# Altium PCB mag_pos_nutz.PcbDoc
Units mm, origin at the board's own origin, x right, y up, seen from the top; angles counter-clockwise.
Board outline 100 x 100 mm, 4 copper layers (Top Layer, Layer 1, Layer 2, Bottom Layer), stack 0.961 mm thick; 11 components, 0 nets, 16 pads, 0 vias.
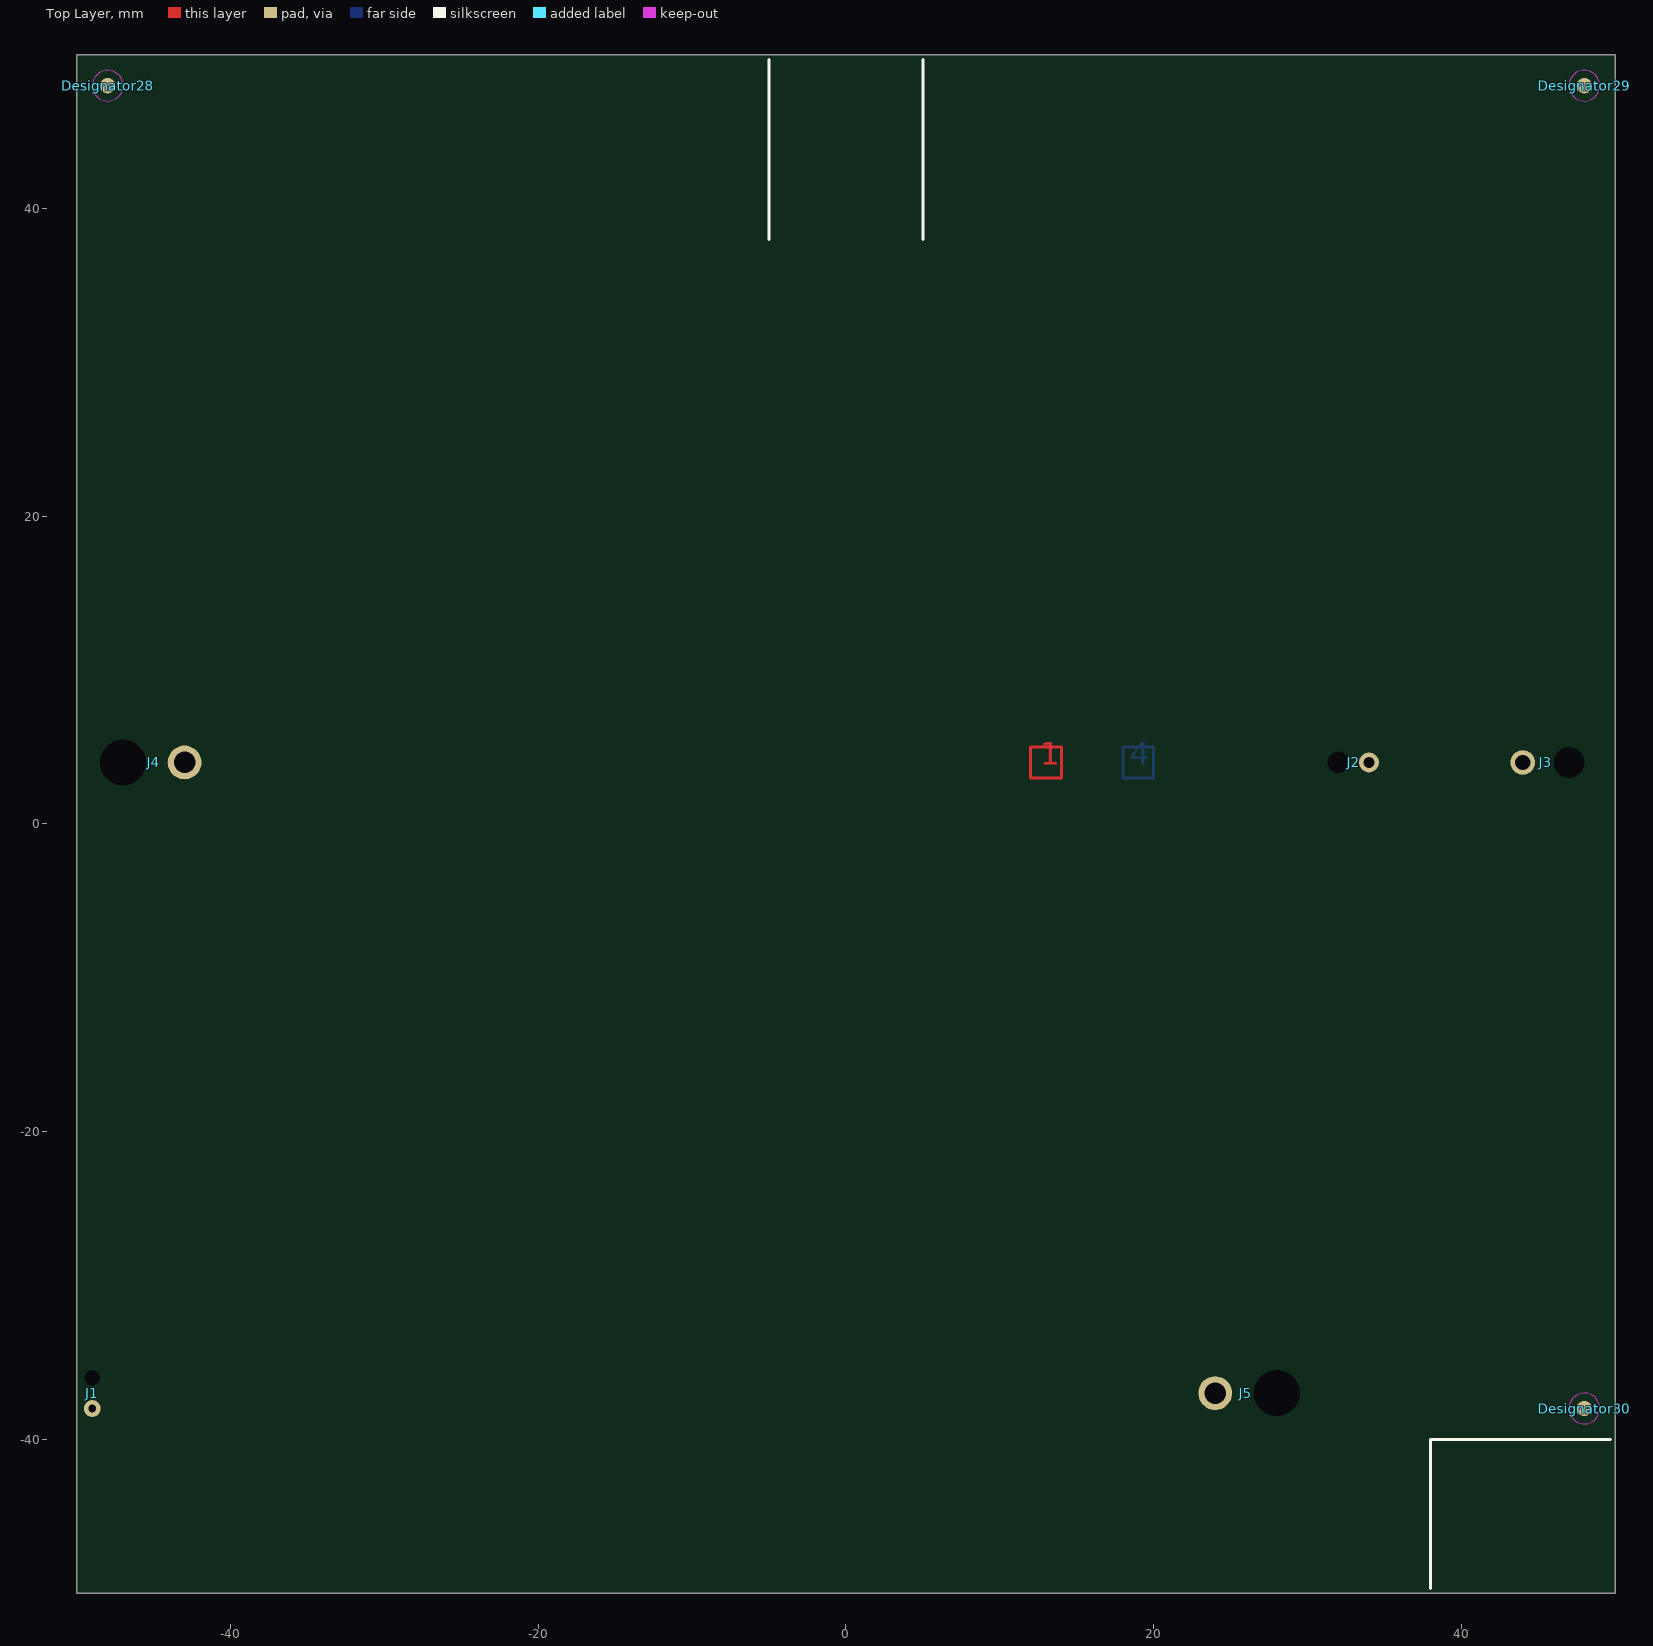
[diagram p0: Top Layer view]
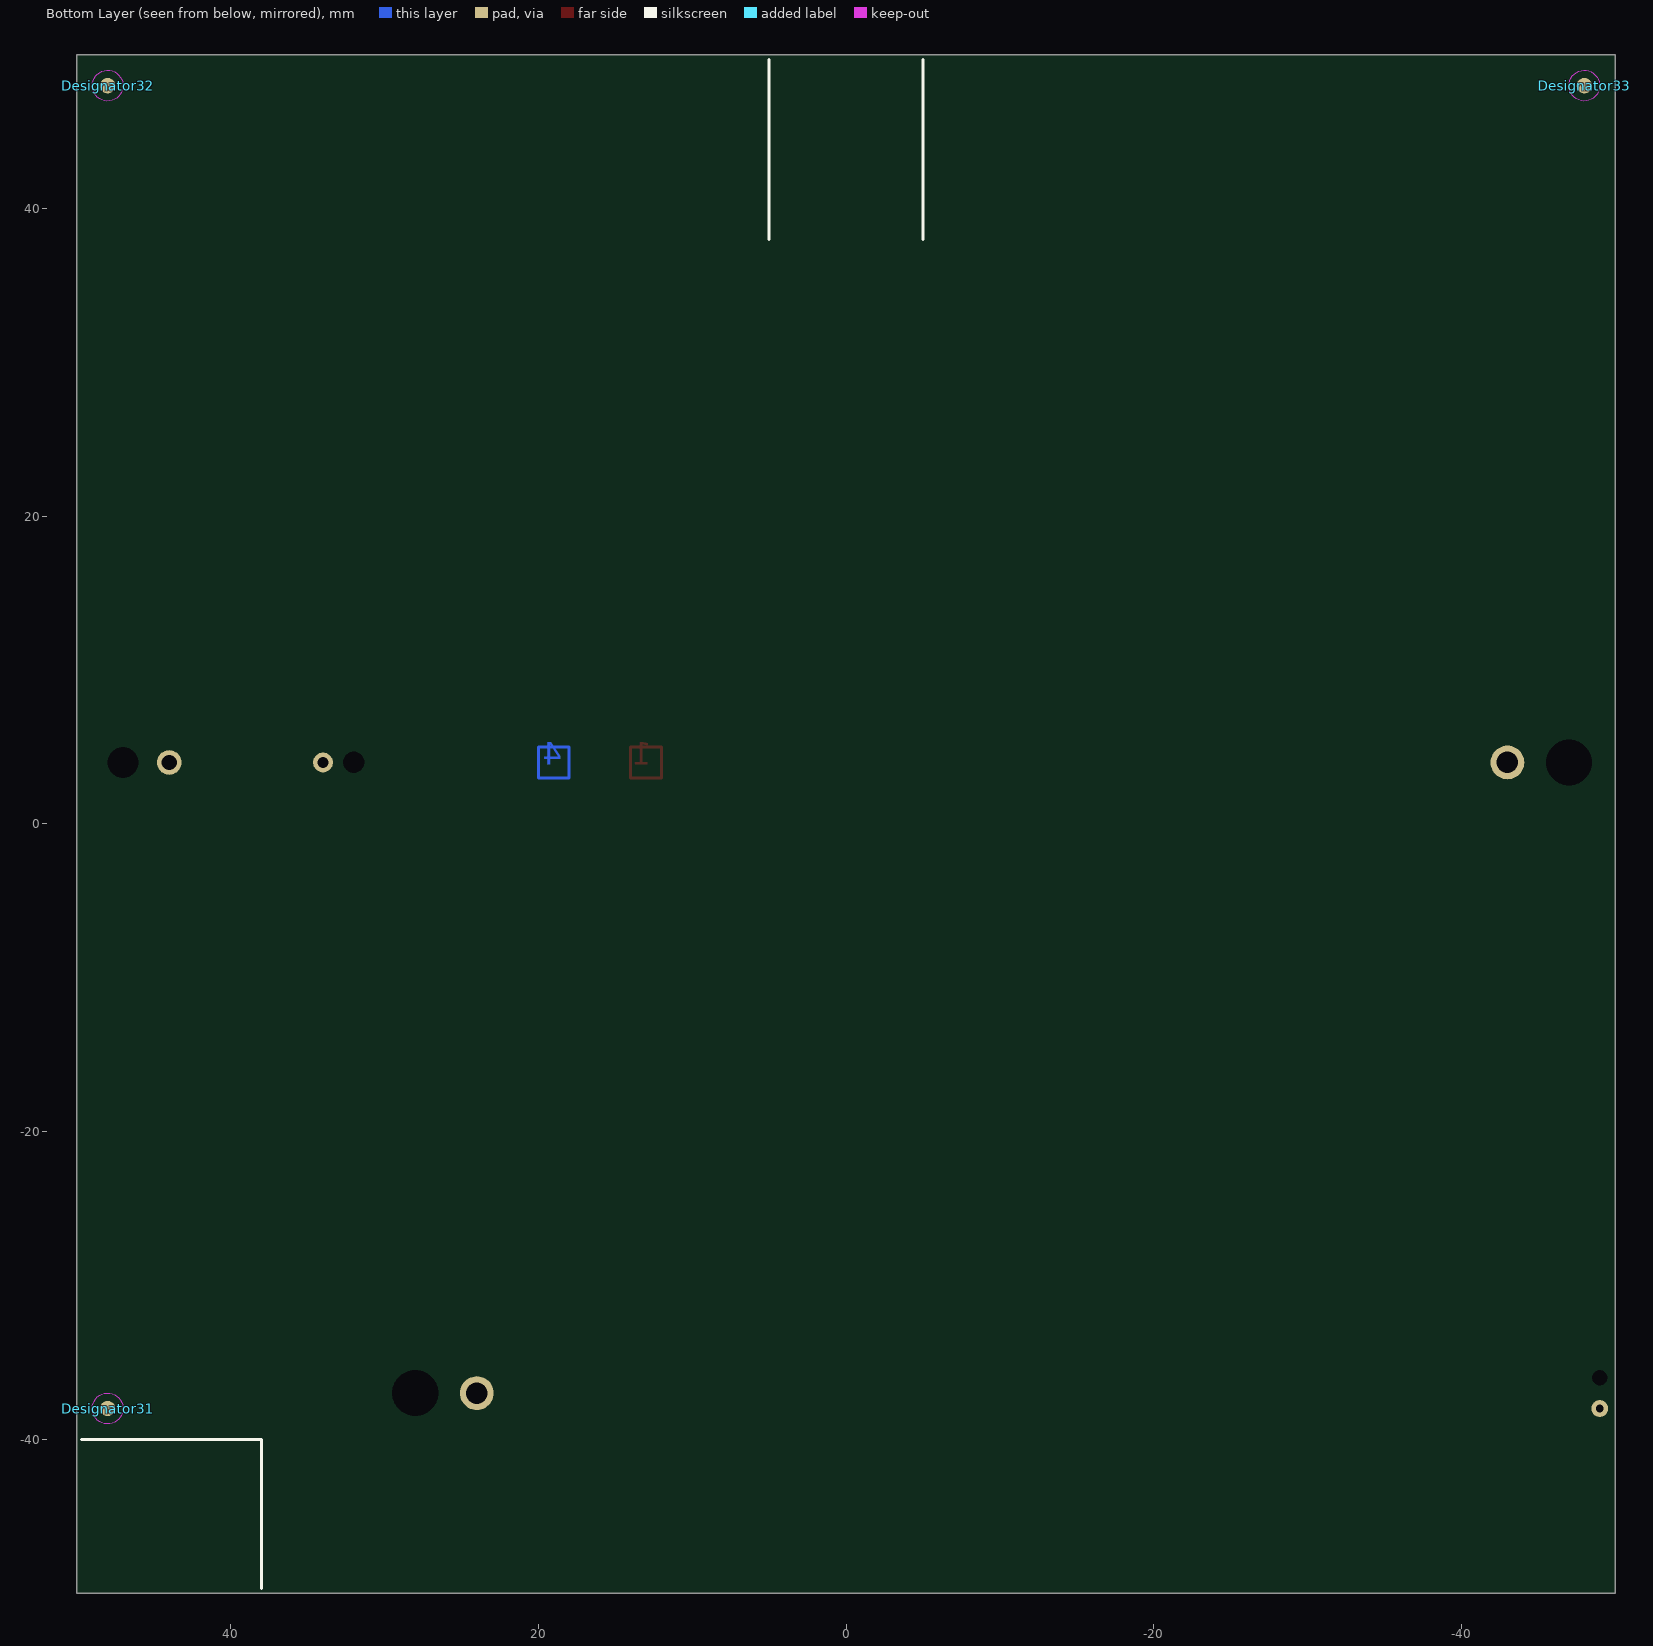
[diagram p1: Bottom Layer view, seen from below]
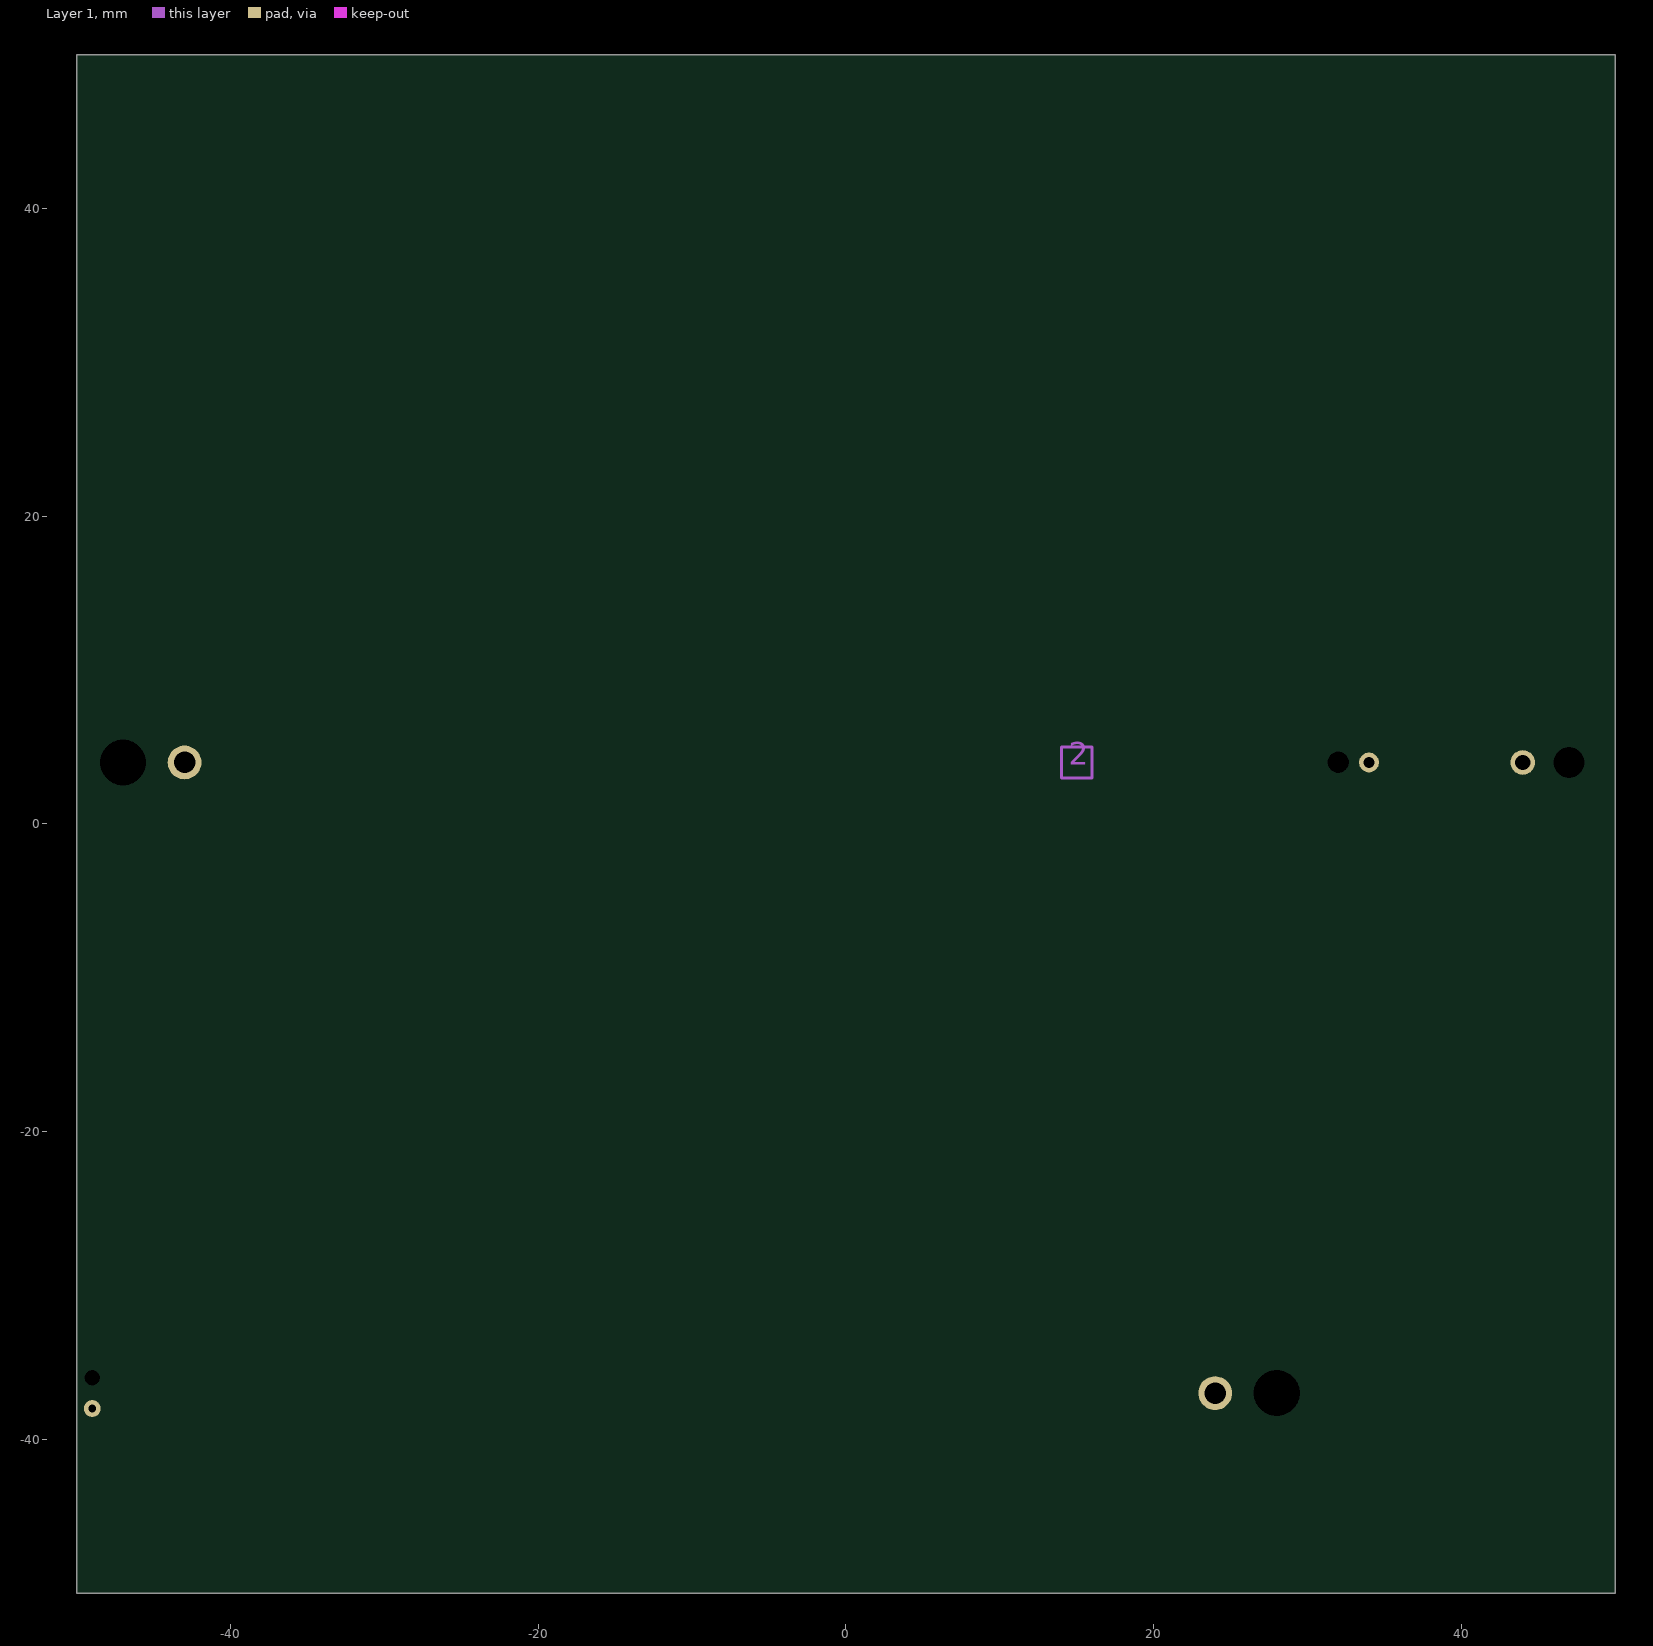
[diagram p2: Layer 1]
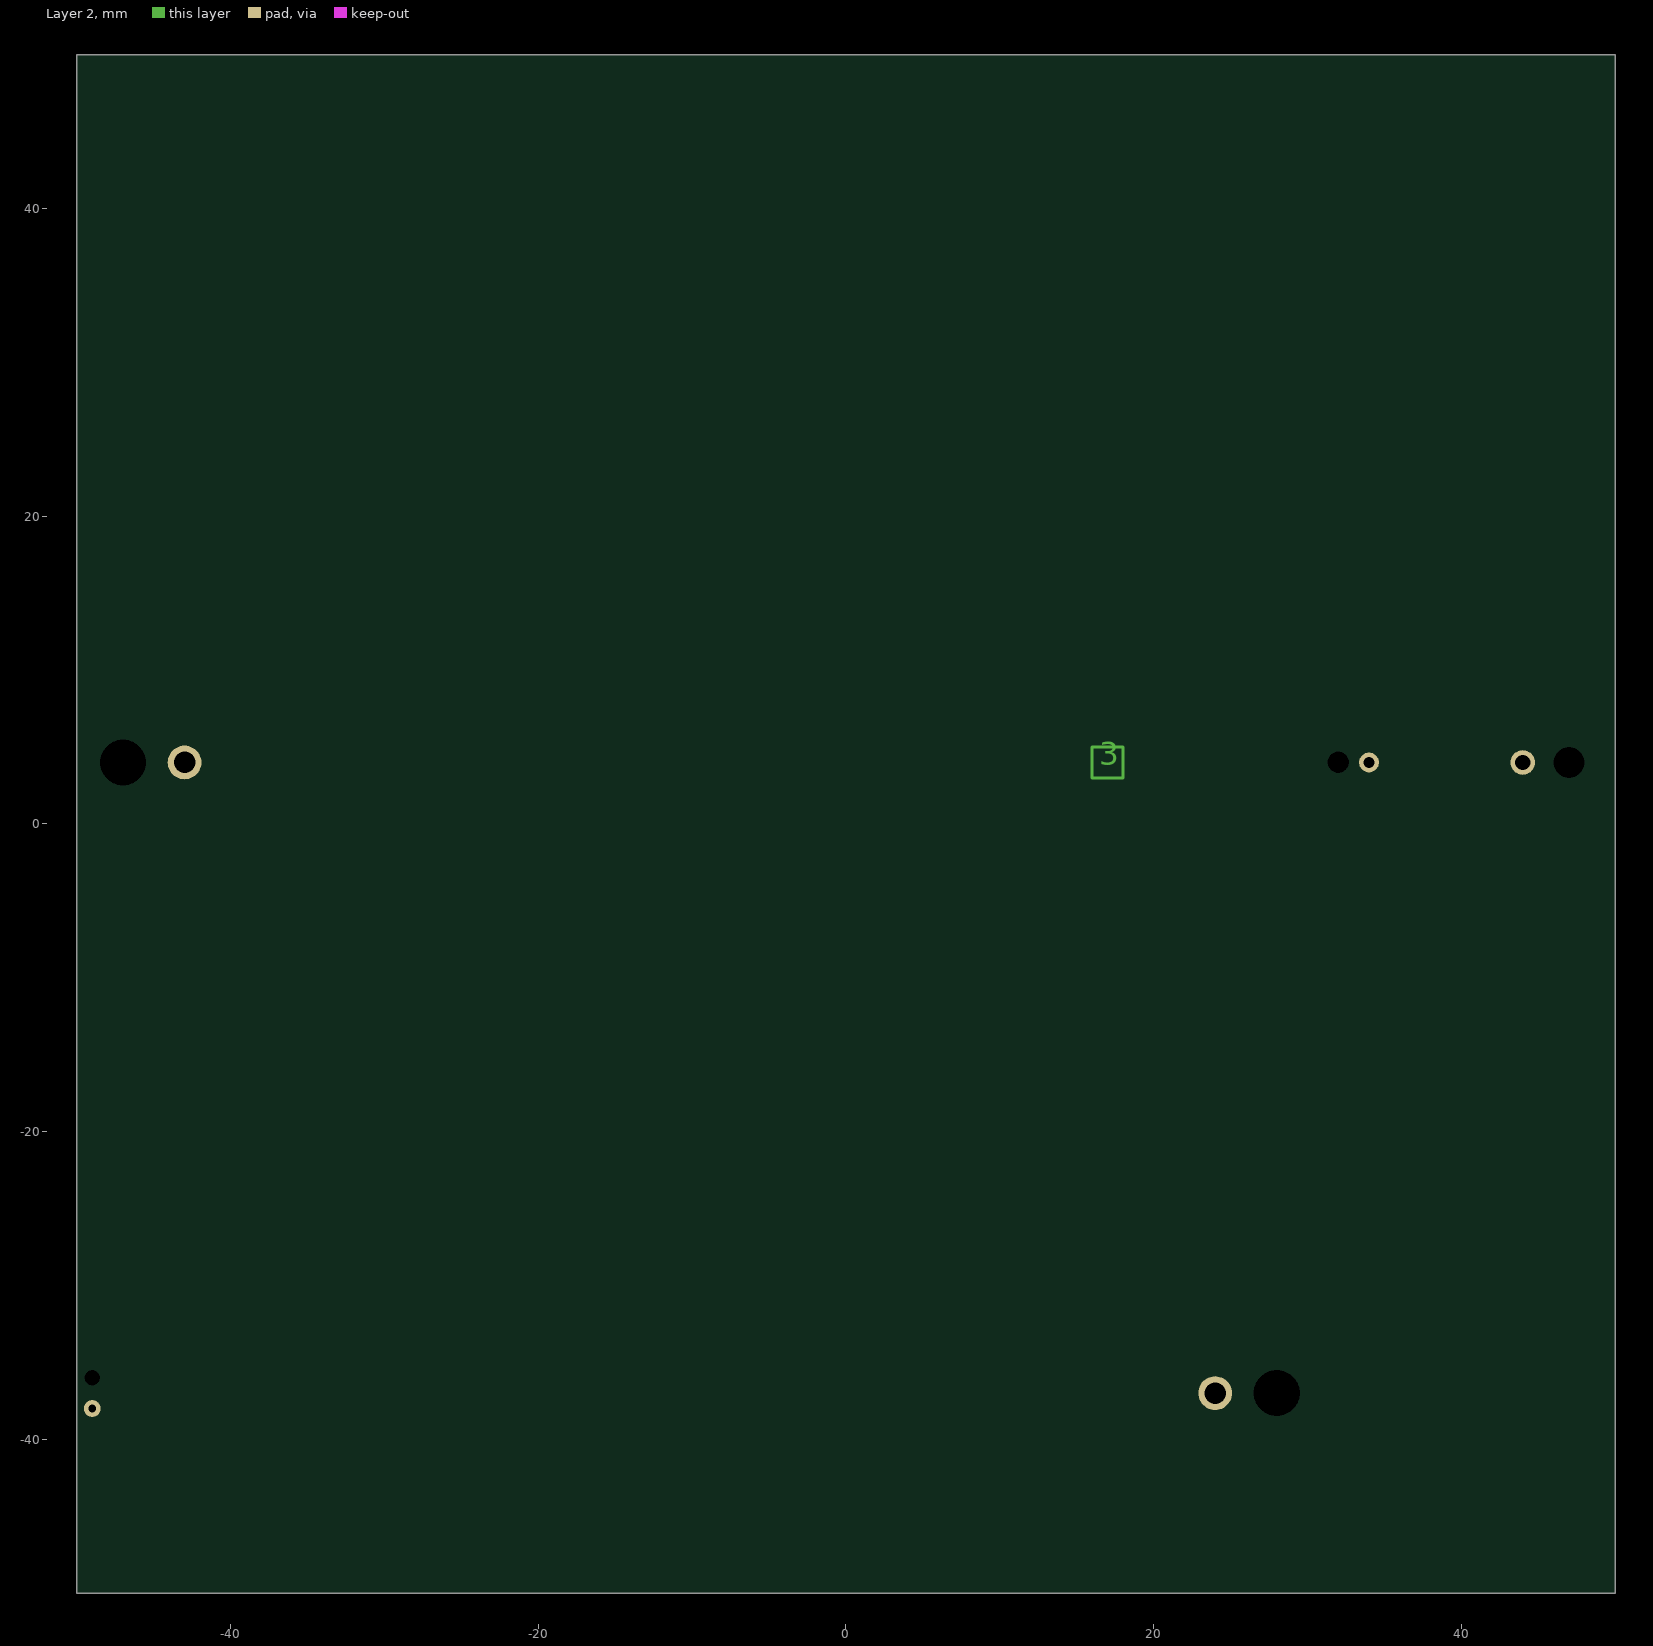
[diagram p3: Layer 2]

## Layer stack, top to bottom
Top Solder: solder mask 0.0102, Solder Resist, Dk 3.5
Top Layer: signal copper 0.0356
Dielectric 2: prepreg 0.11, PP-006, Dk 4.1
Layer 1: signal copper 0.035
Dielectric 1: dielectric 0.6, FR-4, Dk 4.8
Layer 2: signal copper 0.035
Dielectric 3: prepreg 0.11, PP-006, Dk 4.1
Bottom Layer: signal copper 0.0356
Bottom Solder: solder mask 0.0102, Solder Resist, Dk 3.5

## Board outline
-50,-50 -50,50 50,50 50,-50

## Design rules (kind name [scope] priority, off if disabled: settings)
Clearance [All] p1: gap=0.2 ignorepadtopadclearanceinfootprint=FALSE except(0: Arc-Hole Track-Hole SMDPad-Hole THPad-Hole Via-Hole Fill-Hole Poly-Hole Region-Hole Text-Hole)
PolygonConnect [All] p1: connectstyle=Relief reliefconductorwidth=0.254 reliefentries=4 polygonreliefangle="90 Angle" airgapwidth=0.254
RoutingVias [All] p1: holewidth=0.711 width=1.27 viastyle="Through Hole" minholewidth=0.711 minwidth=1.27 maxholewidth=0.711 maxwidth=1.27
SolderMaskExpansion [All] p1: expansion=0.102 istentingtop=FALSE
Width [All] p1: maxlimit=0.5 minlimit=0.2 preferedwidth=0.2 minimp=50.000000 maximp=50.000000 favimp=50.000000
30 further rules are at their usual default settings.

## Components (designator, comment, footprint, x,y, rotation, side; value= is the part's Value field where it differs from the comment)
Designator28 "Comment" Fiducial_Marker -48,48 r0 top
Designator29 "Comment" Fiducial_Marker 48,48 r0 top
Designator30 "Comment" Fiducial_Marker 48,-38 r0 top
Designator31 "Comment" Fiducial_Marker 48,-38 r180 bottom
Designator32 "Comment" Fiducial_Marker 48,48 r180 bottom
Designator33 "Comment" Fiducial_Marker -48,48 r180 bottom
J1 "0.034mm^2" CON_1X1_WIRE_0.034MM2_RELIEF -49,-38 r90 top (schematic designator J6)
J2 "0.1mm^2" CON_1X1_WIRE_0.1MM2_RELIEF 34,4 r180 top (schematic designator J6)
J3 "0.25mm^2" CON_1X1_WIRE_0.25MM2_RELIEF 44,4 r0 top (schematic designator J6)
J4 "0.5mm^2" CON_1X1_WIRE_0.5MM2_RELIEF -43,4 r180 top (schematic designator J6)
J5 "0.5mm^2" CON_1X1_WIRE_0.5MM2_RELIEF 24,-37 r0 top (schematic designator J6)

## Footprints (in the part's own frame and the unit in brackets; to place one, negate y for a bottom-side part, rotate by r counter-clockwise, add the part's x,y. Pads: shape width x height; smd on the part's side, far side on the other; paste and mask are expansions set on the pad)
CON_1X1_WIRE_0.1MM2_RELIEF [mm] "Connection for a 0.1mm^2 wire with strain relief"
  round 1.3 hole 0.7: 1(0,0)
  round 0 hole 1.4 unplated: M(2,0)
CON_1X1_WIRE_0.5MM2_RELIEF [mm] "Connection for a 0.5mm^2 wire with strain relief"
  round 2.2 hole 1.4: 1(0,0)
  round 0 hole 3 unplated: M(4,0)
CON_1X1_WIRE_0.25MM2_RELIEF [mm] "Connection for a 0.25mm^2 wire with strain relief"
  round 1.6 hole 1: 1(0,0)
  round 0 hole 2 unplated: M(3,0)
CON_1X1_WIRE_0.034MM2_RELIEF [mm] "Connection for a 0.034mm^2 wire with strain relief"
  round 1.1 hole 0.5: 1(0,0)
  round 0 hole 1 unplated: M(2,0)
Fiducial_Marker [mm] "Fiducial 1mm 2mm"
  round 1 smd mask+0.5: Fid(0,0)
  Top Layer keep-out circle w0.01: c0,0 r1

## Part data
J1: library part Wire_0.034MM2_RELIEF, "0.034mm^2 wire with strain relief", System=Connector
J2: library part Wire_0.034MM2_RELIEF, "0.1mm^2 wire with strain relief", System=Connector
J3: library part Wire_0.034MM2_RELIEF, "0.25mm^2 wire with strain relief", System=Connector
J4 J5: library part Wire_0.034MM2_RELIEF, "0.5mm^2 wire with strain relief", System=Connector

## Nets (pads, with @x,y where several pads share a name; then routed paths per layer and width w, separated by ;. In a path a pad name is that pad's centre, name@x,y a point inside that pad or via, vN(x,y) a via of type N, cw(c..) or ccw(c..) an arc to the next point about the centre after c; other vN are vias at no path point)
pads on no net: Designator28.Fid Designator29.Fid Designator30.Fid Designator31.Fid Designator32.Fid Designator33.Fid J1.1 J1.M J2.1 J2.M J3.1 J3.M J4.1 J4.M J5.1 J5.M
copper on no net: | length 32
  Top Layer w0.2: 12,3 14,3 14,5 12,5 12,3
  Layer 1 w0.2: 14,3 14,5 16,5 16,3 14,3
  Layer 2 w0.2: 16,3 18,3 18,5 16,5 16,3
  Bottom Layer w0.2: 18,3 20,3 20,5 18,5 18,3

## Other copper
Top Layer:
  text "1" at 12.637,3.356 h2.5
Layer 1:
  text "2" at 14.47,3.356 h2.5
Layer 2:
  text "3" at 16.476,3.366 h2.5
Bottom Layer:
  text "4" at 18.445,3.356 h2.5

## Silkscreen, mask and mechanical layers (free items; w line width, h text height)
Top Overlay:
  lines w0.2: -5,38 -5,49.7 ; 5,38 5,49.7 ; 38,-49.7 38,-40 49.7,-40
Bottom Overlay:
  lines w0.2: -5,38 -5,49.7 ; 5,38 5,49.7 ; 38,-49.7 38,-40 49.7,-40
Mechanical 3:
  text "Notes for manufacturing / CAM:  / The PCB has a square outline with the dimensions 100mm x 100mm.  /  / The PCB contains a total of 48 milled slots with a width of 2mm. The ends of the slots are marked with 2mm drill holes.  /  / Board outline and milled slots are marked with lines in GM16." at 56,32.318 h2
Board:
  the board outline again, w0.001

## Dimensions
50,-50 to 50,50 on Mechanical 3
-50,-50 to 50,-50 on Mechanical 3

## Panel: embedded boards
"..\mag_pos_con_FX-30\mag_pos_con_FX-30_THT.PcbDoc" at -50,31.25, 1 rows x 1 columns, spacing 63.5 x 38.1, rotation 270
"..\mag_pos_con_FX-30\mag_pos_con_FX-30_THT.PcbDoc" at -50,-13.75, 1 rows x 1 columns, spacing 63.5 x 38.1, rotation 270
"..\mag_pos_con_FX-30\mag_pos_con_FX-30_THT.PcbDoc" at -21.75,50, 1 rows x 1 columns, spacing 63.5 x 38.1, rotation 180
"..\mag_pos_con_FX-30\mag_pos_con_FX-30_THT.PcbDoc" at 31.25,50, 1 rows x 1 columns, spacing 63.5 x 38.1, rotation 180
"..\mag_pos_con_FX-30\mag_pos_con_FX-30_THT.PcbDoc" at 50,21.75, 1 rows x 1 columns, spacing 63.5 x 38.1, rotation 90
"..\mag_pos_con_FX-30\mag_pos_con_FX-30_THT.PcbDoc" at 50,-23.25, 1 rows x 1 columns, spacing 63.5 x 38.1, rotation 90
"..\mag_pos_con_FX-30\mag_pos_con_FX-30_SMT.PcbDoc" at -5,38, 1 rows x 1 columns, spacing 63.5 x 38.1, rotation 0
"..\mag_pos_con_FX-30\mag_pos_con_FX-30_SMT.PcbDoc" at 50,-50, 1 rows x 1 columns, spacing 63.5 x 38.1, rotation 90
"..\..\..\inverter_reliant\15_Layout\inv_lv_input_protection\inv_lv_input_protection.PcbDoc" at -50,-45, 1 rows x 1 columns, spacing 63.5 x 38.1, rotation 0
"..\..\..\buck_automotive\hw\buck_automotive.PcbDoc" at 0,38, 1 rows x 1 columns, spacing 25 x 25, rotation 270
"..\mag_pos_connect\mag_pos_connect.PcbDoc" at -39,14, 2 rows x 1 columns, spacing 45 x 55, rotation 180
"mag_pos_breakout.PcbDoc" at -39,14, 2 rows x 1 columns, spacing 45 x 55, rotation 180
"..\mag_pos_adapter\mag_pos_adapter.PcbDoc" at 26.5,-18.5, 1 rows x 1 columns, spacing 45 x 55, rotation 270
"mag_pos.PcbDoc" at 39,-6, 1 rows x 1 columns, spacing 45 x 55, rotation 270
"mag_pos_breakout.PcbDoc" at 39,-6, 1 rows x 1 columns, spacing 45 x 55, rotation 270
"mag_pos.PcbDoc" at 14,-31, 1 rows x 1 columns, spacing 45 x 55, rotation 90
"mag_pos_breakout.PcbDoc" at 14,-31, 1 rows x 1 columns, spacing 45 x 55, rotation 90
"mag_pos.PcbDoc" at 14,-6, 1 rows x 1 columns, spacing 45 x 55, rotation 90
"mag_pos_breakout.PcbDoc" at 14,-6, 1 rows x 1 columns, spacing 45 x 55, rotation 90
"mag_pos.PcbDoc" at 14,14, 1 rows x 1 columns, spacing 45 x 55, rotation 90
"mag_pos_breakout.PcbDoc" at 14,14, 1 rows x 1 columns, spacing 45 x 55, rotation 90
"mag_pos_breakout.PcbDoc" at -14,-6, 1 rows x 1 columns, spacing 45 x 55, rotation 270
"mag_pos.PcbDoc" at -14,-6, 1 rows x 1 columns, spacing 45 x 55, rotation 270
"..\mag_pos_connect\mag_pos_connect.PcbDoc" at -39,-6, 1 rows x 1 columns, spacing 45 x 55, rotation 0
"mag_pos_breakout.PcbDoc" at -39,-6, 1 rows x 1 columns, spacing 45 x 55, rotation 0
"mag_pos_breakout.PcbDoc" at 14,39, 1 rows x 1 columns, spacing 45 x 55, rotation 0
"..\mag_pos_connect\mag_pos_connect.PcbDoc" at 14,39, 1 rows x 1 columns, spacing 45 x 55, rotation 0
"..\mag_pos_adapter\mag_pos_adapter_guide.PcbDoc" at -26.5,-18.5, 1 rows x 1 columns, spacing 45 x 55, rotation 270
"..\mag_pos_adapter\mag_pos_adapter_guide.PcbDoc" at 26.5,26.5, 1 rows x 1 columns, spacing 45 x 55, rotation 90
"..\..\..\inverter_reliant\15_Layout\inv_analog_out_channel\inv_analog_out_channel.PcbDoc" at 26,-45, 1 rows x 1 columns, spacing 63.5 x 38.1, rotation 90
"mag_pos.PcbDoc" at -39,39, 1 rows x 1 columns, spacing 45 x 55, rotation 90
"mag_pos_breakout.PcbDoc" at -39,39, 1 rows x 1 columns, spacing 45 x 55, rotation 90
"..\mag_pos_adapter\mag_pos_adapter.PcbDoc" at -26.5,26.5, 1 rows x 1 columns, spacing 45 x 55, rotation 90
"..\mag_pos_connect\mag_pos_connect.PcbDoc" at -14,39, 1 rows x 2 columns, spacing 45 x 53, rotation 0
"mag_pos_breakout.PcbDoc" at -14,39, 1 rows x 2 columns, spacing 45 x 53, rotation 0
"mag_pos.PcbDoc" at -14,14, 2 rows x 2 columns, spacing 53 x 45, rotation 270
"mag_pos_breakout.PcbDoc" at -14,14, 2 rows x 2 columns, spacing 53 x 45, rotation 270